# Altium PCB BMS_Current_Sense.PcbDoc
Units mm, origin at the board's own origin, x right, y up, seen from the top; angles counter-clockwise.
Board outline 39.5 x 34.35 mm, 2 copper layers (Top Layer, Bottom Layer), stack 1.595 mm thick; 57 components, 30 nets, 170 pads, 84 vias.
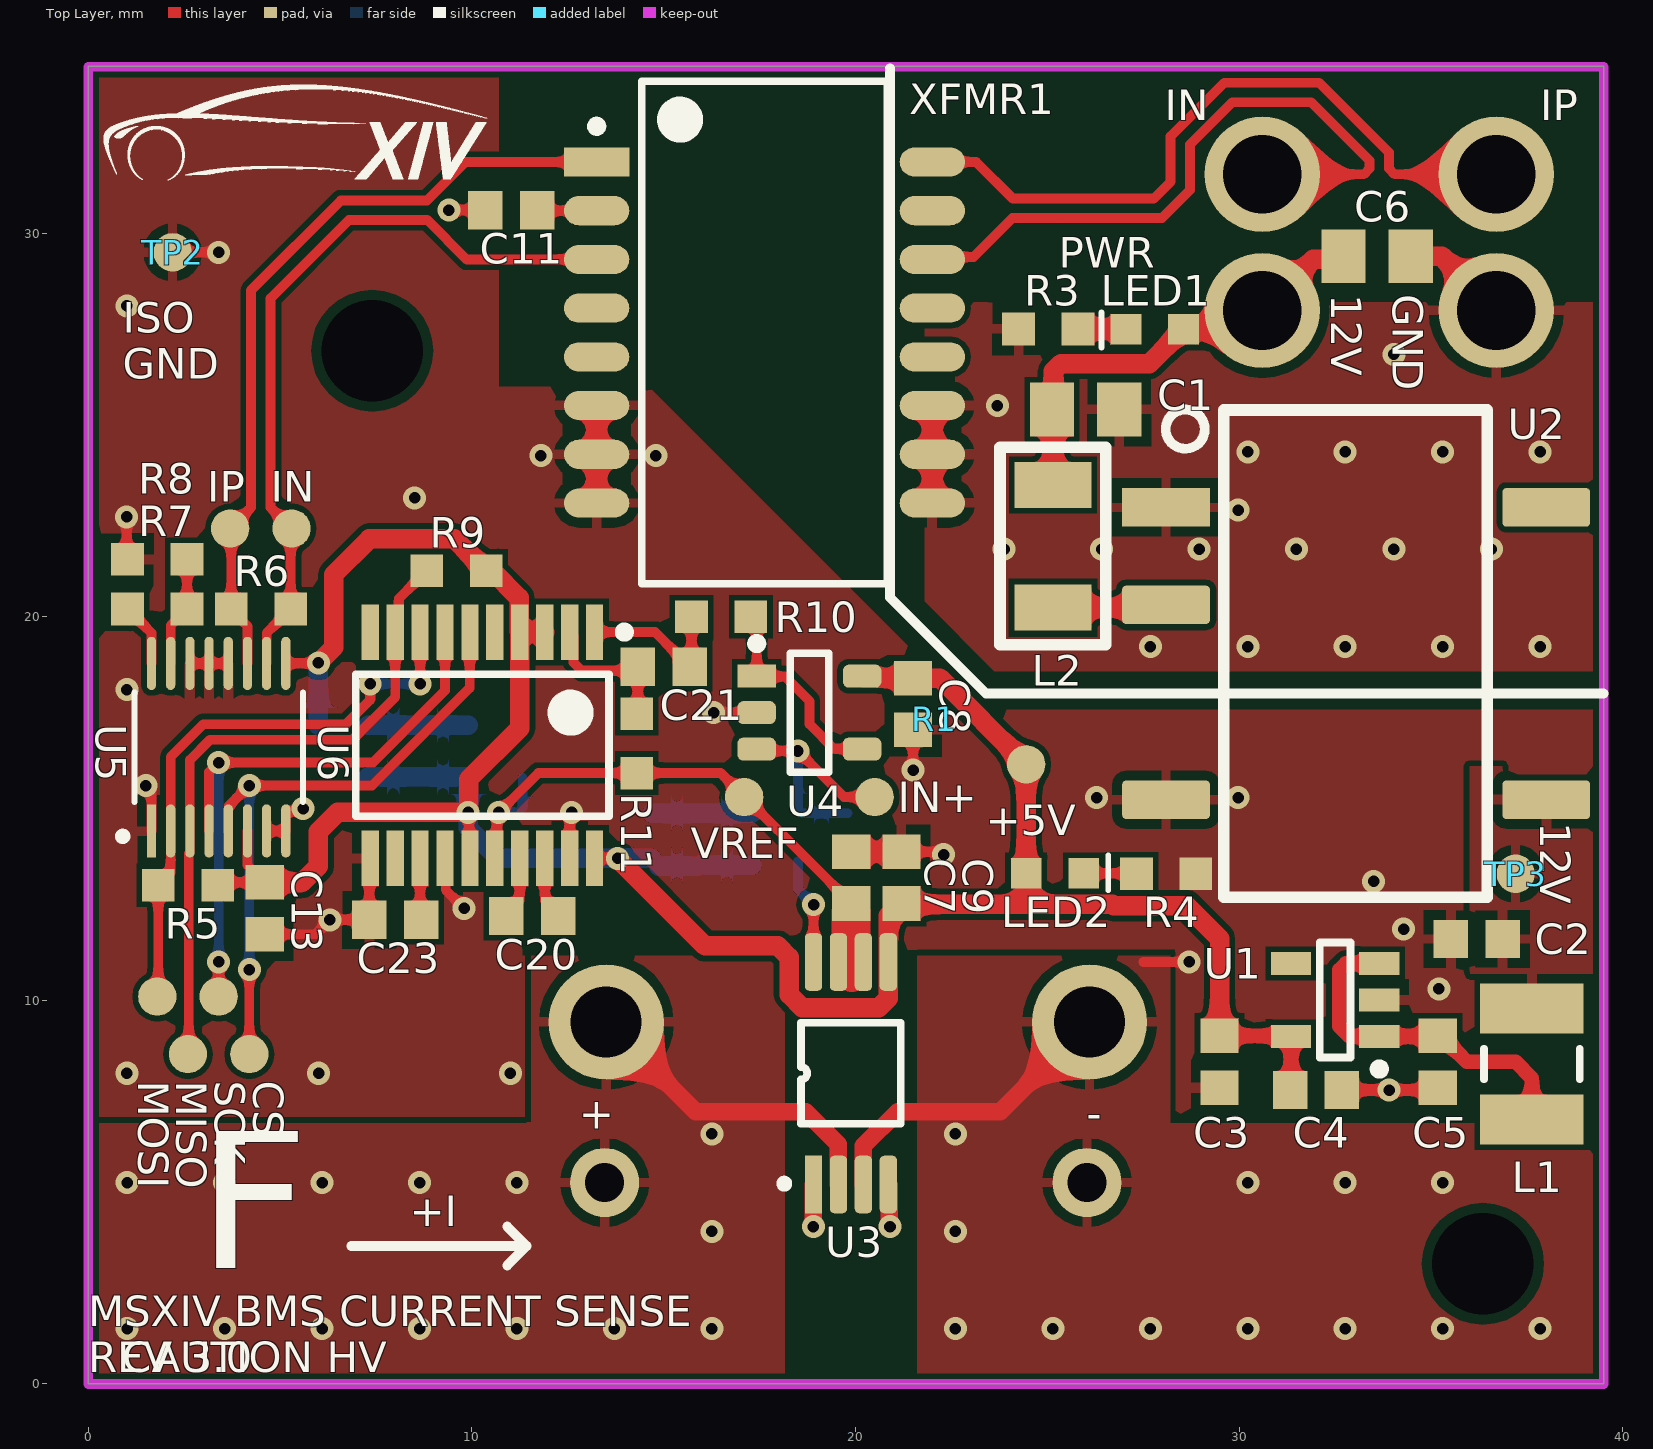
[diagram p0: Top Layer view]
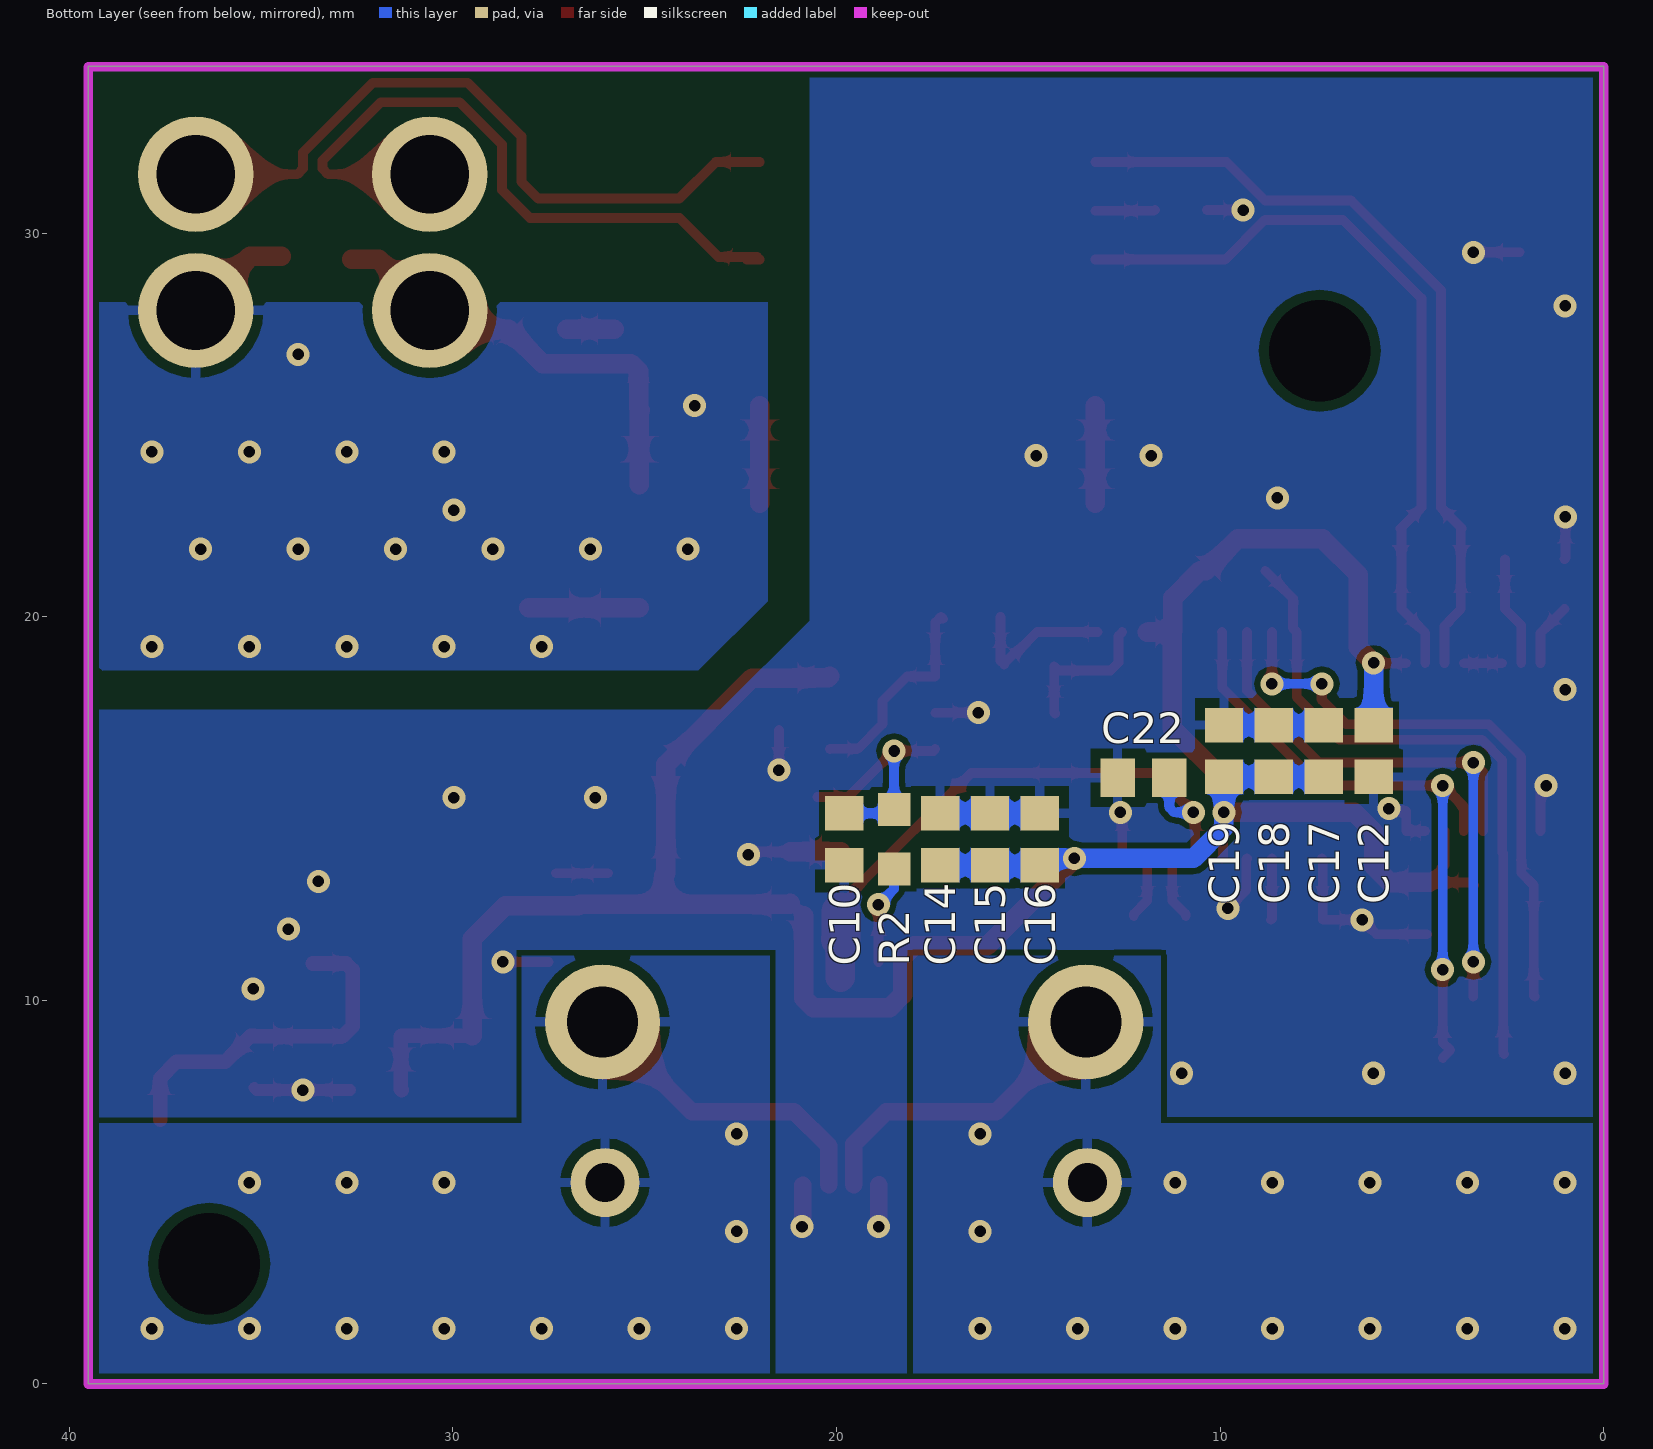
[diagram p1: Bottom Layer view, seen from below]
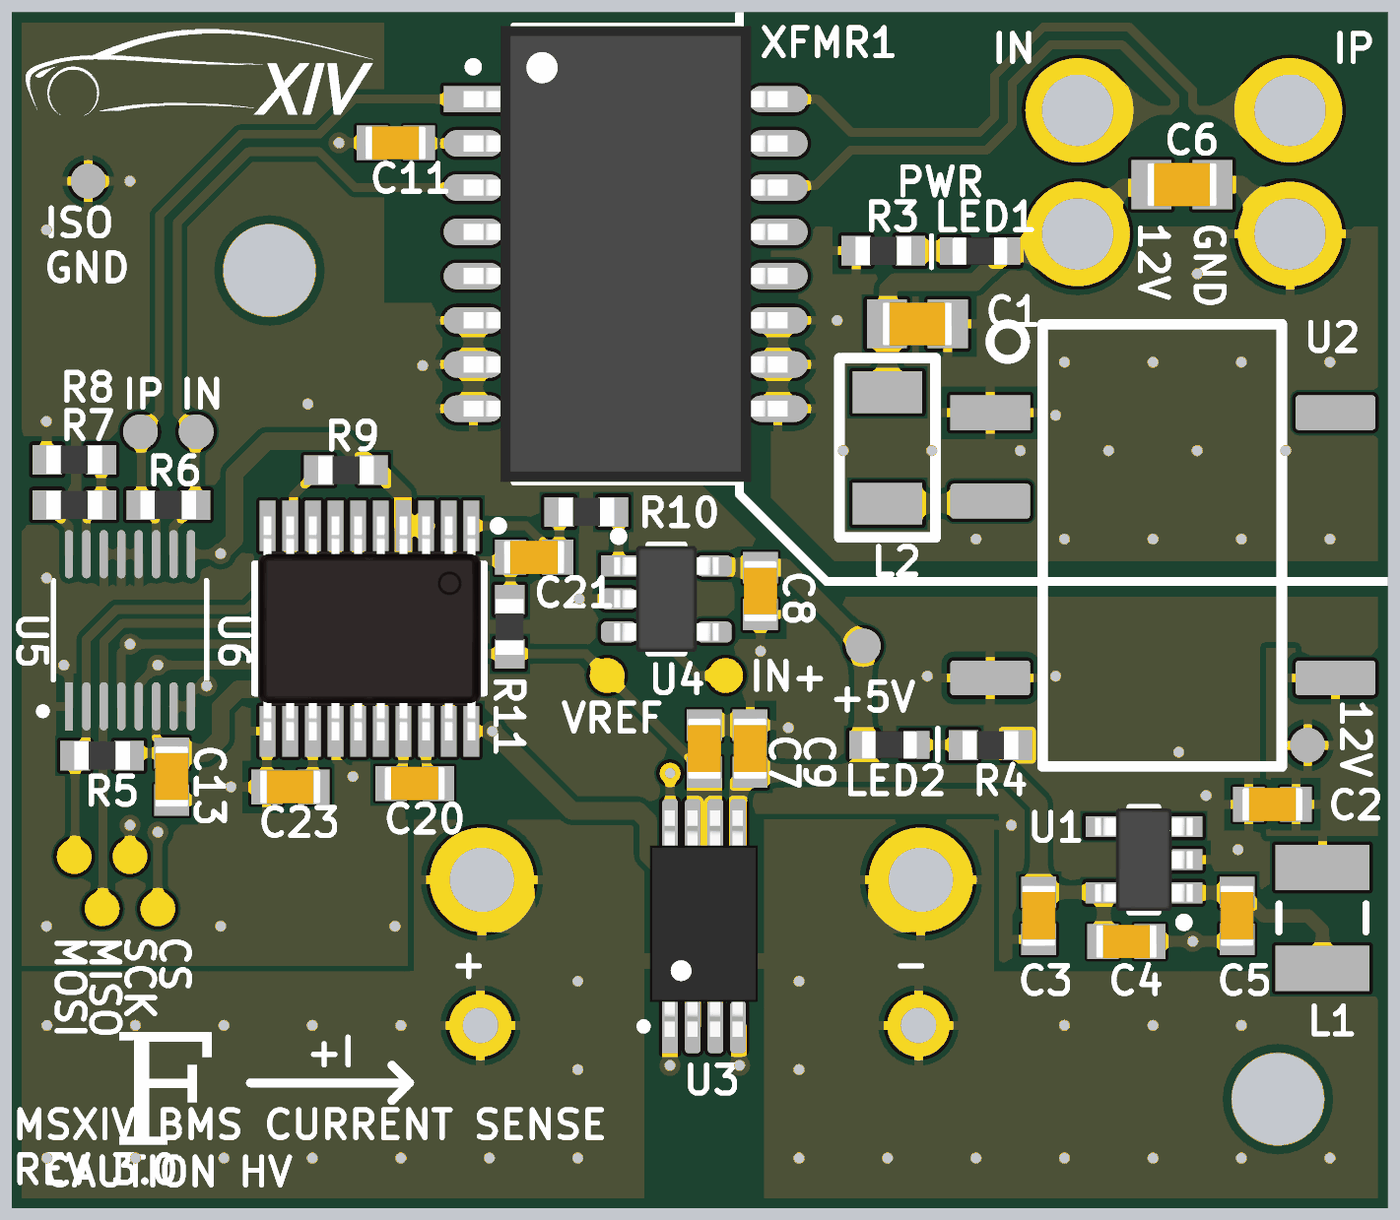
[diagram p2: 3D render of the assembled board from above, using the file's embedded part models]
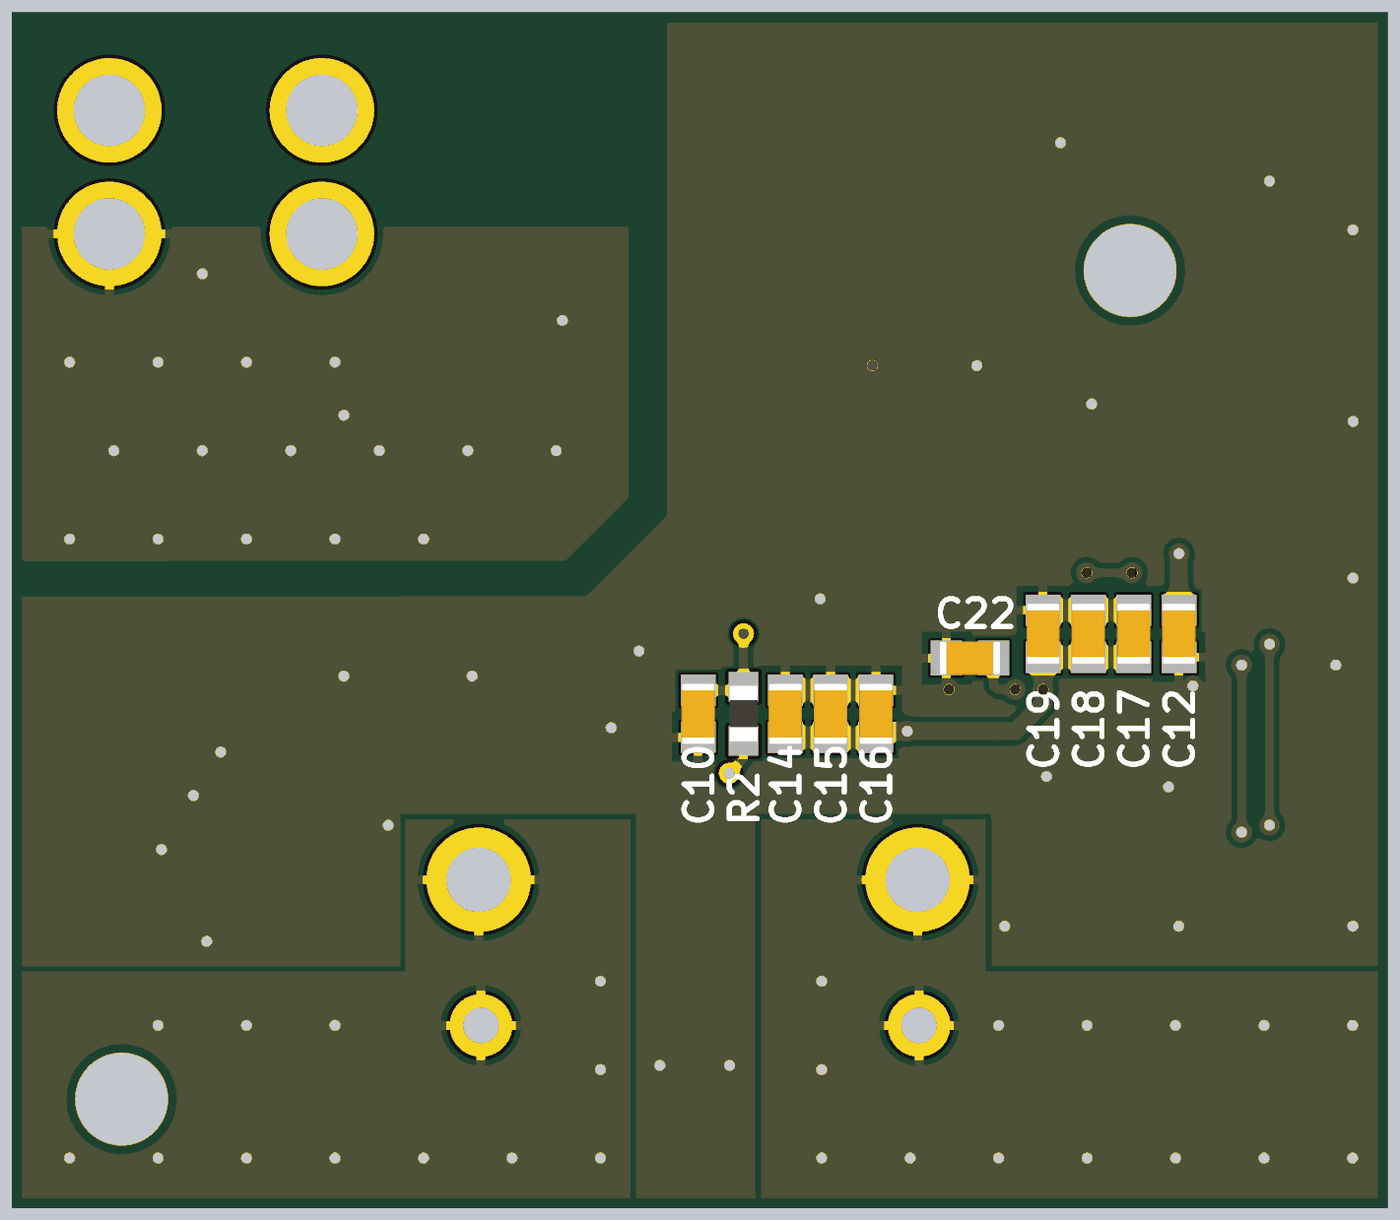
[diagram p3: 3D render of the assembled board from below, using the file's embedded part models]

## Layer stack, top to bottom
Top Solder: solder mask 0.0025, Solder Resist, Dk 0
Top Layer: signal copper 0.0356
Core: dielectric 1.524, FR-4, Dk 4.6
Bottom Layer: signal copper 0.0356
Bottom Solder: solder mask 0.0025, Solder Resist, Dk 0

## Board outline
0.006,0 39.506,0 39.506,34.35 0.006,34.35

## Design rules (kind name [scope] priority, off if disabled: settings)
Clearance "R1 Clearence" [InComponent('R1')] p1: gap=0.254 ignorepadtopadclearanceinfootprint=FALSE except(0: Arc-Hole Track-Hole SMDPad-SMDPad SMDPad-Hole THPad-THPad THPad-Hole Via-Hole Fill-Hole Poly-Hole Region-Hole Text-Hole)
Clearance [All] p2: gap=0.152 ignorepadtopadclearanceinfootprint=FALSE except(0: Arc-Hole Track-Hole SMDPad-Hole THPad-Hole Via-Hole Fill-Hole Poly-Hole Region-Hole Text-Hole)
ComponentClearance "R1 Clearance" [InComponent('R1')] p1: gap=0 collisioncheckmode=3 verticalgap=0 showdistances=FALSE
ComponentClearance [All] p2: gap=0.254 collisioncheckmode=3 verticalgap=0.254 showdistances=FALSE
DiffPairsRouting [All] p1: maxlimit=0.254 minlimit=0.254 mostfreqgap=0.254 toplayer_minwidth=0.254 toplayer_maxwidth=0.381 toplayer_prefwidth=0.254 bottomlayer_minwidth=0.254 bottomlayer_maxwidth=0.381 bottomlayer_prefwidth=0.254 maxuncoupledlength=12.7
PolygonConnect "Via Connect" [IsVia] p1: connectstyle=Direct reliefconductorwidth=0.254 reliefentries=4 polygonreliefangle="90 Angle" airgapwidth=0.254
PolygonConnect "Shunt Terminals" [InComponent('R4')and (InNet('SENSE_2_P') or InNet('SENSE_N'))] p2: connectstyle=Direct reliefconductorwidth=0.254 reliefentries=4 polygonreliefangle="90 Angle" airgapwidth=0.254
PolygonConnect [Not(IsVia)] p3: connectstyle=Relief reliefconductorwidth=0.254 reliefentries=4 polygonreliefangle="90 Angle" airgapwidth=0.254
RoutingVias [All] p1: holewidth=0 width=0.6 viastyle="Through Hole" minholewidth=0.3 minwidth=0.6 maxholewidth=0.711 maxwidth=1.27
SolderMaskExpansion [All] p1: expansion=0.102
Width [All] p1: maxlimit=1.27 minlimit=0.152 preferedwidth=0.254
28 further rules are at their usual default settings.

## Classes and differential pairs
component class ADC_Circuit: C14 C15 C16 C17 C18 C19 C20 C21 C22 C23 C? R9 R10 R11 U6 U?
component class isoSPI_Interface: C11 C12 C13 C? CS I_P IN IP MISO MOSI R5 R6 R7 R8 SCK TP? U5 U? XFMR1
component class BMS_Current_Sense: +5V "ADC IN" Ain C1 C2 C3 C4 C5 C6 C7 C8 C9 C10 C? IN+ "ISO GND" L1 L2 L? "LDO +5V" LED1 LED2 LED? R1 R2 R3 R4 TP2 TP3 TP? U1 U2 U3 U4 U? VREF
differential pair I_3: +I_3_P -I_3_N
differential pair ISOSPI_3: +ISOSPI_3_P -ISOSPI_3_N

## Components (designator, comment, footprint, x,y, rotation, side; value= is the part's Value field where it differs from the comment)
+5V "Test Point" "TEST POINT" 24.45,16.15 r90 top (schematic designator TP4)
C1 "CAP CER 4.7UF 50V 10% X5R 0805" "CAP, 0805" 26,25.4 r0 top value=4.7uF
C2 "CAP CER 2.2UF 25V 10% X5R 0603" "CAP, 0603" 36.195,11.6 r180 top
C3 "CAP CER 2.2UF 25V 10% X5R 0603" "CAP, 0603" 29.489,8.4 r270 top
C4 "CAP CER 1UF 50V 10% X7R 0603" "CAP, 0603" 32.004,7.663 r0 top
C5 "CAP CER 1UF 50V 10% X7R 0603" "CAP, 0603" 35.179,8.4 r270 top
C6 "CAP CER 10uF 25V 10% X5R 0805" "CAP, 0805" 33.6,29.4 r0 top
C7 "CAP CER 0.022UF 50V 10% X7R 0603" "CAP, 0603" 19.888,13.2 r90 top
C8 "CAP CER 0.1UF 50V 10% X7R 0603" "CAP, 0603" 21.5,17.725 r270 top
C9 "CAP CER 0.1UF 50V 10% X7R 0603" "CAP, 0603" 21.2,13.2 r90 top
C10 "CAP CER 10nF 50V 5% X7R 0603" "CAP, 0603" 19.8,14.2 r270 bottom
C11 "CAP CER 20PF 50V ±5% C0G/NP0 0603" "CAP, 0603" 11.025,30.6 r180 top
C12 "CAP CER 0.1UF 50V 10% X7R 0603" "CAP, 0603" 6,16.5 r270 bottom
C13 "CAP CER 0.1UF 50V 10% X7R 0603" "CAP, 0603" 4.6,12.4 r270 top
C14 "CAP CER 1UF 50V 10% X7R 0603" "CAP, 0603" 17.3,14.2 r90 bottom
C15 "CAP CER 0.1UF 50V 10% X7R 0603" "CAP, 0603" 16,14.2 r90 bottom
C16 "CAP CER 0.022UF 50V 10% X7R 0603" "CAP, 0603" 14.7,14.2 r90 bottom
C17 "CAP CER 1UF 50V 10% X7R 0603" "CAP, 0603" 7.3,16.5 r90 bottom
C18 "CAP CER 0.1UF 50V 10% X7R 0603" "CAP, 0603" 8.6,16.5 r90 bottom
C19 "CAP CER 0.022UF 50V 10% X7R 0603" "CAP, 0603" 9.9,16.5 r90 bottom
C20 "CAP CER 1UF 50V 10% X7R 0603" "CAP, 0603" 11.575,12.2 r0 top
C21 "CAP CER 10nF 50V 5% X7R 0603" "CAP, 0603" 15,18.7 r180 top
C22 "CAP CER 1UF 50V 10% X7R 0603" "CAP, 0603" 12,15.8 r0 bottom
C23 "CAP CER 1UF 50V 10% X7R 0603" "CAP, 0603" 8,12.1 r180 top
CS "Test Point" "Test Point"#1 4.2,8.5 r90 top (schematic designator TP10)
IN "Test Point" "TEST POINT" 5.3,22.3 r90 top (schematic designator TP6)
IN+ "Test Point" "Test Point"#2 20.5,15.3 r90 top (schematic designator TP1)
IP "Test Point" "TEST POINT" 3.7,22.3 r90 top (schematic designator TP5)
L1 "IND 100uH 60mA 5% 1210" 1210 37.643,8.349 r270 top value=100uH
L2 "IND 6.8uH 260mA 20% 1210" "NLFV32T-6R8M-EF/IND 6.8uH" 25.146,23.436 r270 top
LED1 "LED YELLOW CLEAR 2.1V 0603" LED_0603 28.5,27.5 r180 top
LED2 "LED GREEN CLEAR 2V 0603" LED_0603 24.5,13.3 r0 top
MISO "Test Point" "Test Point"#2 2.6,8.6 r0 top (schematic designator TP8)
MOSI "Test Point" "Test Point"#2 1.8,10.1 r0 top (schematic designator TP7)
R1 "100uOhm Shunt Resistor" "RES SHUNT 100UOHM 60MM" 26.103,9.433 r180 top locked
R2 "RES 120 OHM 1% 1/10W 0603" "RES, 0603" 18.5,14.2 r90 bottom
R3 "RES 4.7K OHM 1% 1/10W 0603" "RES, 0603" 25.025,27.5 r180 top
R4 "2K" "RES, 0603" 28.1,13.3 r0 top
R5 "2K" "RES, 0603" 2.6,13 r180 top
R6 "RES 120 OHM 1% 1/10W 0603" "RES, 0603" 4.5,20.2 r0 top
R7 "RES 1.4k OHM 1% 1/10W 0603" "RES, 0603" 1.8,20.2 r0 top
R8 "RES 604 OHM 1% 1/10W 0603" "RES, 0603" 1.8,21.5 r180 top
R9 "2K" "RES, 0603" 9.6,21.2 r180 top
R10 "RES 22.1 OHM 1% 1/10W 0603" "RES, 0603" 16.5,20 r180 top
R11 "RES 22.1 OHM 1% 1/10W 0603" "RES, 0603" 14.3,16.7 r90 top
SCK "Test Point" "Test Point"#2 3.4,10.1 r0 top (schematic designator TP9)
TP2 "Test Point" "TEST POINT" 2.2,29.5 r90 top
TP3 "Test Point" "TEST POINT" 37.206,13.3 r90 top
U1 "IC REG LDO 5V 0.1A SOT23-5" SOT95P280X145-5N 32.505,10.01 r180 top
U2 "IC DCDC ISOLATED 12V 1W 8-SMD 5-LEAD" "IC, Isolated DCDC" 29.246,22.85 r270 top locked
U3 "100V/V" "IC CURRENT AMPLIFIER INA240 TSSOP-8" 18.906,5.2 r90 top
U4 "IC OP AMP GEN PURPOSE RR 5.5MHZ SOT-23-5" "IC OP AMP GP RR 10MHZ SOT-23-5" 18.8,17.5 r0 top
U5 "IC ISOSPI COMM INTERFACE LTC6820IMS#3ZZPBF" "IC isoSPI Interface LTC6820 MSOP" 3.4,16.6 r90 top locked
U6 "IC ADC 24BIT SPI 14KSPS 20TSSOP" TSSOP65P640X120-20N 10.275,16.65 r270 top
VREF "Test Point" "Test Point"#2 17.1,15.3 r90 top (schematic designator TP11)
XFMR1 "IC PULSE XFMR 1CT:1CT 350UH SMD" "IC, PULSE XFMR 1CT:1CT 350UH SMD" 17.629,27.409 r0 top
? "Comment" "MSXIV Logo" 0.4,31.375 r0 top

## Footprints (in the part's own frame and the unit in brackets; to place one, negate y for a bottom-side part, rotate by r counter-clockwise, add the part's x,y. Pads: shape width x height; smd on the part's side, far side on the other; paste and mask are expansions set on the pad)
1210 [mm]
  rect 1.3x2.7 smd: 1(-1.441,-0.01) 2(1.459,-0.01)
  silkscreen extent -0.39,-1.26 0.41,1.24, body extent -1.69,-1.36 1.71,1.34, height 1.5
"CAP, 0603" [mm] "Chip Capacitor, 2-Leads, Body 1.60x0.81mm, IPC Medium Density"
  rect 0.9x1 smd mask+0.076: 1(-0.675,0) 2(0.675,0)
  body extent -0.87,-0.48 0.87,0.48, height 0.9
"CAP, 0805" [mm] "Chip Capacitor, 2-Leads, Body 2.00x1.25mm, IPC Medium Density"
  rect 1.15x1.4 smd: 1(-0.875,0) 2(0.875,0)
  body extent -1,-0.63 1,0.63, height 1.25
"IC CURRENT AMPLIFIER INA240 TSSOP-8" [mm]
  rect 1.5x0.45 smd: 1(0,0)
  rrect50% 1.5x0.45 smd: 2(0,-0.65) 3(0,-1.3) 4(0,-1.95) 5(5.8,-1.95) 6(5.8,-1.3) 7(5.8,-0.65) 8(5.8,0)
  silkscreen extent -0.06,-2.28 4.22,0.84, body extent -0.28,-2.52 6.22,0.58, height 1.2
"IC isoSPI Interface LTC6820 MSOP" [mil]
  rect 54.56x9.43 smd paste+0 mask+0: 1(-86,68.95)
  oval 54.56x9.43 smd paste+0 mask+0: 2(-86,49.25) 3(-86,29.55) 4(-86,9.85) 5(-86,-9.85) 6(-86,-29.55) 7(-86,-49.25) 8(-86,-68.95) 9(86,-68.95) 10(86,-49.25) 11(86,-29.55) 12(86,-9.85) 13(86,9.85) 14(86,29.55) 15(86,49.25) 16(86,68.95)
  silkscreen extent -95,-86 56,102
"IC OP AMP GP RR 10MHZ SOT-23-5" [mm] "SOT23, 5-Leads, Body 2.90x2.80mm, Pitch 0.95mm, IPC Medium Density"
  rect 1x0.6 smd: 1(-1.375,0.95)
  rrect50% 1x0.6 smd: 2(-1.375,0) 3(-1.375,-0.95) 4(1.375,-0.95) 5(1.375,0.95)
  silkscreen extent -1.5,-1.55 0.5,1.92, body extent -1.5,-1.53 1.5,1.53, height 1.45
"IC, Isolated DCDC" [mm]
  rect 1x2.29 smd: 1(0,-1.15)
  rrect20% 1x2.29 smd: 2(2.54,-1.15) 4(7.62,-1.15) 5(7.62,8.76) 8(0,8.76)
  silkscreen extent -2.55,-1.16 10.16,7.22, body extent -2.54,0.35 10.16,7.22, height 7
"IC, PULSE XFMR 1CT:1CT 350UH SMD" [mm] "PULSE XFMR 1CT:1CT 350UH SMD"
  rect 1.7x0.76 smd: 1(-4.375,4.445)
  oval 1.7x0.76 smd: 2(-4.375,3.175) 3(-4.375,1.905) 4(-4.375,0.635) 5(-4.375,-0.635) 6(-4.375,-1.905) 7(-4.375,-3.175) 8(-4.375,-4.445) 9(4.375,-4.445) 10(4.375,-3.175) 11(4.375,-1.905) 12(4.375,-0.635) 13(4.375,0.635) 14(4.375,1.905) 15(4.375,3.175) 16(4.375,4.445)
  silkscreen extent -4.5,-6.55 3.2,6.55, body extent -4.65,-6.55 4.65,6.55, height 5.9
LED_0603 [mm]
  rect 0.8x0.8 smd: 1(-0.05,0.01) 2(1.45,0.01)
  silkscreen extent 2.09,-0.43 2.09,0.48, body extent -0.1,-0.39 1.5,0.41, height 0.55
"MSXIV Logo" [mm]
  silkscreen extent 0,0 10,2.49
"NLFV32T-6R8M-EF/IND 6.8uH" [mm]
  rect 1.2x2 smd: 1(0,0) 2(3.2,0)
  silkscreen extent -0.98,-1.38 4.17,1.38, body extent -0.98,-1.38 4.17,1.38, height 2.2
"RES SHUNT 100UOHM 60MM" [mm]
  round 0 hole 2.65: 0(-10.25,6.3) 0(18.7,-17.5)
  round 3 hole 2.05: 1(-4.5,-18.55) 2(-10.6,-18.55) 3(-4.5,-22.1) 4(-10.6,-22.1)
  round 3 hole 1.85: 5(12.6,0) 6(0,0)
  body extent -36,-29.03 48.99,11.46, height 6.38
"RES, 0603" [mm] "Chip Resistor, 2-Leads, Body 1.60x0.80mm, IPC Medium Density"
  rect 0.85x0.85 smd: 1(-0.775,0) 2(0.775,0)
  body extent -0.8,-0.4 0.8,0.4, height 0.55
SOT95P280X145-5N [mm] "SOT23, 5-Leads, Body 2.95x2.80mm, Pitch 0.95mm, IPC Medium Density"
  rect 1.05x0.6 smd: 1(-1.15,0.95) 2(-1.15,0) 3(-1.15,-0.95) 4(1.15,-0.95) 5(1.15,0.95)
  silkscreen extent -1.28,-1.5 0.4,1.92, body extent -1.4,-1.48 1.4,1.48, height 1.45
"TEST POINT" [mm]
  round 1 smd: TP(0,0)
"Test Point"#1 [mm]
  round 1 smd paste-2: TP(0.1,0)
"Test Point"#2 [mm]
  round 1 smd paste-2: TP(0,0)
TSSOP65P640X120-20N [mm] "TSSOP, 20-Leads, Body 6.50x4.40mm, Pitch 0.65mm, IPC Medium Density"
  rect 1.45x0.45 smd: 1(-2.95,2.925) 2(-2.95,2.275) 3(-2.95,1.625) 4(-2.95,0.975) 5(-2.95,0.325) 6(-2.95,-0.325) 7(-2.95,-0.975) 8(-2.95,-1.625) 9(-2.95,-2.275) 10(-2.95,-2.925) 11(2.95,-2.925) 12(2.95,-2.275) 13(2.95,-1.625) 14(2.95,-0.975) 15(2.95,-0.325) 16(2.95,0.325) 17(2.95,0.975) 18(2.95,1.625) 19(2.95,2.275) 20(2.95,2.925)
  silkscreen extent -3.07,-3.3 1.85,3.83, body extent -3.21,-3.2 3.22,3.2, height 1.11

## Part data
C1: "4.7µF ±20% 50V Ceramic Capacitor X5R 0805 (2012 Metric)", Manufacturer 1="Murata Electronics North America", Manufacturer Part Number 1=GRT21BR61H475ME13L, Operating Temperature="-55°C ~ 85°C", Package / Case="0805 (2012 Metric)", Ratings=AEC-Q200, Supplier Part Number 1=490-12395-1-ND, Temperature Coefficient=X5R, Tolerance=±20%, Voltage - Rated=50V, Applications=Automotive, Category=Capacitors, ComponentLink1Description=http://search.murata.co.jp/Ceramy/image/img/A01X/G101/ENG/GRT21BR61H475ME13-01.pdf, ComponentLink1URL=http://search.murata.co.jp/Ceramy/image/img/A01X/G101/ENG/GRT21BR61H475ME13-01.pdf, Description 1="CAP CER 4.7UF 50V X5R 0805", Features=-, Height - Seated (Max)=-, Lead Spacing=-, Lead Style=-, Mounting Type="Surface Mount, MLCC", Packaging="Cut Tape (CT)", Part Status=Active, Pricing 1="1=0.56, 10=0.389, 100=0.2338, 500=0.17536, 1000=0.14808 (CAD)", RoHS="RoHS Compliant", Size / Dimension="0.079\" L x 0.049\" W (2.00mm x 1.25mm)", Stock 1=4286, Supplier 1=Digi-Key, Thickness (Max)="0.057\" (1.45mm)"
C2 C3: "2.2µF ±10% 25V Ceramic Capacitor X5R 0603 (1608 Metric)", Capacitance=2.2µF, Manufacturer 1="Murata Electronics North America", Manufacturer Part Number 1=GRM188R61E225KA12D, Operating Temperature="-55°C ~ 85°C", Package / Case="0603 (1608 Metric)", Ratings=-, Supplier Part Number 1=490-10731-1-ND, Temperature Coefficient=X5R, Tolerance=±10%, Voltage=25V, ComponentLink1Description=http://www.murata.com/~/media/webrenewal/support/library/catalog/products/capacitor/mlcc/c02e.ashx, ComponentLink1URL=http://www.murata.com/~/media/webrenewal/support/library/catalog/products/capacitor/mlcc/c02e.ashx, Height - Seated (Max)=-, Lead Spacing=-, Lead Style=-, Mounting Type="Surface Mount, MLCC", Packaging="Cut Tape (CT)", Part Status=Active, Size / Dimension="0.063\" L x 0.031\" W (1.60mm x 0.80mm)", Supplier 1=Digi-Key, Thickness (Max)="0.035\" (0.90mm)"
C4 C5 C14 C17 C20 C22 C23: "1µF ±10% 50V Ceramic Capacitor X7R 0603 (1608 Metric)", Capacitance=1µF, Manufacturer 1="Taiyo Yuden", Manufacturer Part Number 1=UMK107AB7105KA-T, Operating Temperature="-55°C ~ 125°C", Package / Case="0603 (1608 Metric)", Ratings=-, Supplier Part Number 1=587-3247-1-ND, Temperature Coefficient=X7R, Tolerance=±10%, Voltage=50V, ComponentLink1Description=http://www.yuden.co.jp/productdata/catalog/en/mlcc_all_e.pdf, ComponentLink1URL=http://www.yuden.co.jp/productdata/catalog/en/mlcc_all_e.pdf, Height - Seated (Max)=-, Lead Spacing=-, Lead Style=-, Mounting Type="Surface Mount, MLCC", Packaging="Cut Tape (CT)", Part Status=Active, Size / Dimension="0.063\" L x 0.031\" W (1.60mm x 0.80mm)", Supplier 1=Digi-Key, Thickness (Max)="0.037\" (0.95mm)"
C6: "10µF ±10% 25V Ceramic Capacitor X5R 0805 (2012 Metric)", Capacitance=10µF, Manufacturer="Murata Electronics North America", Manufacturer Part Number=GRM21BR61E106KA73L, Operating Temperature="-55°C ~ 85°C", Package / Case="0805 (2012 Metric)", Ratings=-, Supplier Part Number 1=490-5523-1-ND, Temperature Coefficient=X5R, Tolerance=±10%, Voltage - Rated=25V, Applications="General Purpose", Category=Capacitors, ComponentLink1Description=http://search.murata.co.jp/Ceramy/image/img/A01X/G101/ENG/GRM21BR61E106KA73-01.pdf, ComponentLink1URL=http://search.murata.co.jp/Ceramy/image/img/A01X/G101/ENG/GRM21BR61E106KA73-01.pdf, Features=-, Height - Seated (Max)=-, Lead Spacing=-, Lead Style=-, Mounting Type="Surface Mount, MLCC", Packaging="Cut Tape (CT)", Part Status=Active, Pricing 1="1=0.3, 10=0.214, 100=0.1008, 500=0.07068, 1000=0.05851 (CAD)", RoHS="RoHS Compliant", Size / Dimension="0.079\" L x 0.049\" W (2.00mm x 1.25mm)", Stock 1=1695157, Supplier 1=Digi-Key, Thickness (Max)="0.053\" (1.35mm)"
C7 C16 C19: "0.022µF ±10% 50V Ceramic Capacitor X7R 0603 (1608 Metric)", Manufacturer 1="Murata Electronics North America", Manufacturer Part Number 1=GRM188R71H223KA01D, Operating Temperature="-55°C ~ 125°C", Package / Case="0603 (1608 Metric)", Ratings=-, Supplier Part Number 1=490-1517-1-ND, Temperature Coefficient=X7R, Tolerance=±10%, Voltage - Rated=50V, Applications="General Purpose", Category=Capacitors, ComponentLink1Description=http://search.murata.co.jp/Ceramy/image/img/A01X/G101/ENG/GRM188R71H223KA01-01.pdf, ComponentLink1URL=http://search.murata.co.jp/Ceramy/image/img/A01X/G101/ENG/GRM188R71H223KA01-01.pdf, Description 1="CAP CER 0.022UF 50V X7R 0603", Features=-, Height - Seated (Max)=-, Lead Spacing=-, Lead Style=-, Mounting Type="Surface Mount, MLCC", Packaging="Cut Tape (CT)", Part Status=Active, Pricing 1="1=0.15, 10=0.111, 100=0.0499, 500=0.03564, 1000=0.02801 (CAD)", RoHS="RoHS Compliant", Size / Dimension="0.063\" L x 0.032\" W (1.60mm x 0.80mm)", Stock 1=612330, Supplier 1=Digi-Key, Thickness (Max)="0.035\" (0.90mm)"
C8 C9 C12 C13 C15 C18: "0.10µF ±10% 50V Ceramic Capacitor X7R 0603 (1608 Metric)", Capacitance=0.1µF, Manufacturer 1="AVX Corporation", Manufacturer Part Number 1=06035C104KAT2A, Operating Temperature="-55°C ~ 125°C", Package / Case="0603 (1608 Metric)", Ratings=-, Supplier Part Number 1=478-5052-1-ND, Temperature Coefficient=X7R, Tolerance=±10%, Voltage=50V, ComponentLink1Description=http://datasheets.avx.com/X7RDielectric.pdf, ComponentLink1URL=http://datasheets.avx.com/X7RDielectric.pdf, Height - Seated (Max)=-, Lead Spacing=-, Lead Style=-, Mounting Type="Surface Mount, MLCC", Packaging="Cut Tape (CT)", Part Status=Active, Size / Dimension="0.063\" L x 0.032\" W (1.60mm x 0.81mm)", Supplier 1=Digi-Key, Thickness (Max)="0.035\" (0.90mm)"
C10 C21: "10000pF ±5% 50V Ceramic Capacitor U2J 0603 (1608 Metric)", Capacitance=10000pF, Manufacturer 1=KEMET, Manufacturer Part Number 1=C0603C103J5JAC7867, Operating Temperature="-55°C ~ 125°C", Package / Case="0603 (1608 Metric)", Ratings=-, Supplier Part Number 1=399-13384-1-ND, Temperature Coefficient=U2J, Tolerance=±5%, Voltage=50V, ComponentLink1Description=http://www.kemet.com/docfinder?Partnumber=C0603C103J5JAC7867, ComponentLink1URL=http://www.kemet.com/docfinder?Partnumber=C0603C103J5JAC7867, Failure Rate=-, Height - Seated (Max)=-, Lead Spacing=-, Lead Style=-, Mounting Type="Surface Mount, MLCC", Packaging="Cut Tape (CT)", Part Status=Active, Size / Dimension="0.063\" L x 0.032\" W (1.60mm x 0.80mm)", Supplier 1=Digi-Key, Thickness (Max)="0.034\" (0.87mm)"
C11: "20pF ±5% 50V Ceramic Capacitor C0G, NP0 0603 (1608 Metric)", Capacitance=20pF, Manufacturer 1="Murata Electronics North America", Manufacturer Part Number 1=GRM1885C1H200JA01D, Operating Temperature="-55°C ~ 125°C", Package / Case="0603 (1608 Metric)", Ratings=-, Supplier Part Number 1=490-1410-1-ND, Temperature Coefficient="C0G, NP0", Tolerance=±5%, Voltage=50V, ComponentLink1Description=http://www.murata.com/~/media/webrenewal/support/library/catalog/products/capacitor/mlcc/c02e.ashx, ComponentLink1URL=http://www.murata.com/~/media/webrenewal/support/library/catalog/products/capacitor/mlcc/c02e.ashx, Height - Seated (Max)=-, Lead Spacing=-, Lead Style=-, Mounting Type="Surface Mount, MLCC", Packaging="Cut Tape (CT)", Part Status=Active, Size / Dimension="0.063\" L x 0.031\" W (1.60mm x 0.80mm)", Supplier 1=Digi-Key, Thickness (Max)="0.035\" (0.90mm)"
L1: "100µH Unshielded Wirewound Inductor 60mA 11 Ohm Max 1210 (3225 Metric)", DC Resistance (DCR)="11 Ohm Max", Manufacturer="EPCOS (TDK)", Manufacturer Part Number=B82422T1104J000, Operating Temperature="-55°C ~ 125°C", Package / Case="1210 (3225 Metric)", Q @ Freq="20 @ 796kHz", Ratings=AEC-Q200, Supplier Part Number 1=495-5646-1-ND, Tolerance=±5%, Category="Inductors, Coils, Chokes", ComponentLink1Description=https://en.tdk.eu/inf/30/db/ind_2008/b82422t.pdf, ComponentLink1URL=https://en.tdk.eu/inf/30/db/ind_2008/b82422t.pdf, Height - Seated (Max)="0.083\" (2.10mm)", Material - Core=Ferrite, Mounting Type="Surface Mount", Packaging="Cut Tape (CT)", Part Status=Active, Pricing 1="1=0.65, 10=0.568, 100=0.4062, 500=0.3412, 1000=0.27621 (CAD)", RoHS="RoHS Compliant", Shielding=Unshielded, Size / Dimension="0.126\" L x 0.098\" W (3.20mm x 2.50mm)", Stock 1=4846, Supplier 1=Digi-Key, Supplier Device Package="1210 (3225 Metric)", Type=Wirewound
L2: "6.8µH Shielded Wirewound Inductor 260mA 204 mOhm Max 1210 (3225 Metric)", Current - Saturation=-, Current Rating=260mA, DC Resistance (DCR)="204 mOhm Max", Inductance=6.8µH, Manufacturer 1="TDK Corporation", Manufacturer Part Number 1=NLFV32T-6R8M-EF, Operating Temperature="-40°C ~ 105°C", Package / Case="1210 (3225 Metric)", Supplier Part Number 1=445-15776-1-ND, Tolerance=±20%, ComponentLink1Description=https://product.tdk.com/info/en/catalog/datasheets/inductor_commercial_decoupling_nlfv32-ef_en.pdf, ComponentLink1URL=https://product.tdk.com/info/en/catalog/datasheets/inductor_commercial_decoupling_nlfv32-ef_en.pdf, Frequency - Self Resonant=-, Height - Seated (Max)="0.094\" (2.40mm)", Material - Core=Ferrite, Mounting Type="Surface Mount", Packaging="Cut Tape (CT)", Part Status=Active, Q @ Freq=-, Ratings=-, Shielding=Shielded, Size / Dimension="0.126\" L x 0.098\" W (3.20mm x 2.50mm)", Supplier 1=Digi-Key, Supplier Device Package="1210 (3225 Metric)", Type=Wirewound
LED1: "Yellow 590nm LED Indication - Discrete 2V 0603 (1608 Metric)", Color=Yellow, Current - Test=20mA, Lens Color=Colorless, Manufacturer="Wurth Electronics Inc.", Manufacturer Part Number=150060YS75000, Millicandela Rating=120mcd, Package / Case="0603 (1608 Metric)", Supplier Device Package=0603, Supplier Part Number 1=732-4981-1-ND, Voltage - Forward (Vf) (Typ)=2V, Category=Optoelectronics, ComponentLink1Description=http://katalog.we-online.de/led/datasheet/150060YS75000.pdf, ComponentLink1URL=http://katalog.we-online.de/led/datasheet/150060YS75000.pdf, Features=-, Height (Max)=0.80mm, Lens Style/Size="Rectangle with Flat Top, 1.10mm x 0.70mm", Lens Transparency=Clear, Mounting Type="Surface Mount", Packaging="Cut Tape (CT)", Part Status=Active, Pricing 1="1=0.21, 100=0.1617, 500=0.13964 (CAD)", RoHS="RoHS Compliant", Size / Dimension="1.60mm L x 0.80mm W", Stock 1=10523, Supplier 1=Digi-Key, Viewing Angle=140°, Wavelength - Dominant=590nm, Wavelength - Peak=595nm
LED2: "Green 572nm LED Indication - Discrete 2V 0603 (1608 Metric)", Color=Green, Current - Test=20mA, Lens Color=Colorless, Manufacturer="Wurth Electronics Inc.", Manufacturer Part Number=150060VS75000, Millicandela Rating=40mcd, Package / Case="0603 (1608 Metric)", Supplier Device Package=0603, Supplier Part Number 1=732-4980-1-ND, Voltage - Forward (Vf) (Typ)=2V, Category=Optoelectronics, ComponentLink1Description=http://katalog.we-online.de/led/datasheet/150060VS75000.pdf, ComponentLink1URL=http://katalog.we-online.de/led/datasheet/150060VS75000.pdf, Features=-, Height (Max)=0.80mm, Lens Style/Size="Rectangle with Flat Top, 1.10mm x 0.70mm", Lens Transparency=Clear, Mounting Type="Surface Mount", Packaging="Cut Tape (CT)", Part Status=Active, Pricing 1="1=0.21, 100=0.1617, 500=0.13964 (CAD)", RoHS="RoHS Compliant", Size / Dimension="1.60mm L x 0.80mm W", Stock 1=9408, Supplier 1=Digi-Key, Viewing Angle=140°, Wavelength - Dominant=570nm, Wavelength - Peak=572nm
R1: library part "RES SHUNT 100UOHM 5% 36W 60MM", "100 µOhms ±5% 36W Shunt, Battery Specialized Resistor Metal Element ±175ppm/°C Shunt Fixture, 60mm Pitch", Manufacturer 1="Vishay Dale", Manufacturer Part Number 1=WSBM8518L1000JK, Operating Temperature="-65°C ~ 170°C", Power (Watts)=36W, Supplier Part Number 1=541-1906-ND, Temperature Coefficient=±175ppm/°C, Tolerance=±5%, Applications=-, Category=Resistors, ComponentLink1Description=http://www.vishay.com/docs/31094/wsbm8518.pdf, ComponentLink1URL=http://www.vishay.com/docs/31094/wsbm8518.pdf, Composition="Metal Element", Description 1="RES SHUNT 100 UOHM 5% 36W", Mounting Type="Shunt Fixture, 60mm Pitch", Packaging=Bulk, Part Status=Active, Pricing 1="1=16.24, 10=14.764, 25=13.2876, 50=11.442, 100=10.5192, 250=9.9656, 500=9.5965, 1000=9.15359 (CAD)", RoHS="RoHS Compliant", Stock 1=0, Supplier 1=Digi-Key, Type="Shunt, Battery"
R2 R6: "RES SMD 120 OHM 1% 1/10W 0603", Manufacturer 1=Yageo, Manufacturer Part Number 1=RC0603FR-07120RL, Operating Temperature="-55°C ~ 155°C", Package / Case="0603 (1608 Metric)", Power=1/10W, Resistance=120, Supplier Device Package=0603, Supplier Part Number 1=311-120HRCT-ND, Temperature Coefficient=±100ppm/°C, Tolerance=±1%, ComponentLink1Description=http://www.yageo.com/documents/recent/PYu-RC_Group_51_RoHS_L_7.pdf, ComponentLink1URL=http://www.yageo.com/documents/recent/PYu-RC_Group_51_RoHS_L_7.pdf, Composition="Thick Film", Failure Rate=-, Height - Seated (Max)="0.022\" (0.55mm)", Packaging="Cut Tape (CT)", Part Status=Active, Size / Dimension="0.063\" L x 0.031\" W (1.60mm x 0.80mm)", Supplier 1=Digi-Key
R3: "4.7k Ohm ±1% 0.1W, 1/10W Chip Resistor 0603 (1608 Metric) Moisture Resistant Thick Film", Manufacturer 1=Yageo, Manufacturer Part Number 1=RC0603FR-074K7L, Operating Temperature="-55°C ~ 155°C", Package / Case="0603 (1608 Metric)", Power (Watts)=1/10W, Resistance (Ohms)=4.7k, Supplier Device Package=0603, Supplier Part Number 1=311-4.70KHRCT-ND, Temperature Coefficient=±100ppm/°C, Tolerance=±1%, Category=Resistors, ComponentLink1Description=http://www.yageo.com/documents/recent/PYu-RC_Group_51_RoHS_L_7.pdf, ComponentLink1URL=http://www.yageo.com/documents/recent/PYu-RC_Group_51_RoHS_L_7.pdf, Composition="Thick Film", Description 1="RES SMD 4.7K OHM 1% 1/10W 0603", Failure Rate=-, Features="Moisture Resistant", Height - Seated (Max)="0.022\" (0.55mm)", Packaging="Cut Tape (CT)", Part Status=Active, Pricing 1="1=0.16, 10=0.022, 100=0.0089, 1000=0.00402, 2500=0.00349 (CAD)", RoHS="RoHS Compliant", Size / Dimension="0.063\" L x 0.031\" W (1.60mm x 0.80mm)", Stock 1=3487566, Supplier 1=Digi-Key
R4 R5 R9: library part "RES 2K OHM 1% 1/10W 0603", "2k Ohm ±1% 0.1W, 1/10W Chip Resistor 0603 (1608 Metric) Moisture Resistant Thick Film", Manufacturer=Yageo, Manufacturer Part Number=RC0603FR-072KL, Operating Temperature="-55°C ~ 155°C", Package / Case="0603 (1608 Metric)", Power (Watts)="0.1W, 1/10W", Resistance (Ohms)=2k, Supplier Device Package=0603, Supplier Part Number 1=311-2.00KHRCT-ND, Temperature Coefficient=±100ppm/°C, Tolerance=±1%, Category=Resistors, ComponentLink1Description=http://www.yageo.com/documents/recent/PYu-RC_Group_51_RoHS_L_7.pdf, ComponentLink1URL=http://www.yageo.com/documents/recent/PYu-RC_Group_51_RoHS_L_7.pdf, Composition="Thick Film", Failure Rate=-, Features="Moisture Resistant", Height - Seated (Max)="0.022\" (0.55mm)", Packaging="Cut Tape (CT)", Part Status=Active, Pricing 1="1=0.15, 10=0.023, 100=0.0093, 1000=0.00415, 2500=0.0036 (CAD)", RoHS="RoHS Compliant", Size / Dimension="0.063\" L x 0.031\" W (1.60mm x 0.80mm)", Stock 1=1750701, Supplier 1=Digi-Key
R7: "RES SMD 1.4K OHM 1% 1/10W 0603", Manufacturer 1=Yageo, Manufacturer Part Number 1=RC0603FR-071K4L, Operating Temperature="-55°C ~ 155°C", Package / Case="0603 (1608 Metric)", Power=1/10W, Resistance=1.4k, Supplier Device Package=0603, Supplier Part Number 1=311-1.40KHRCT-ND, Temperature Coefficient=±100ppm/°C, Tolerance=±1%, ComponentLink1Description=http://www.yageo.com/documents/recent/PYu-RC_Group_51_RoHS_L_7.pdf, ComponentLink1URL=http://www.yageo.com/documents/recent/PYu-RC_Group_51_RoHS_L_7.pdf, Composition="Thick Film", Failure Rate=-, Height - Seated (Max)="0.022\" (0.55mm)", Packaging="Cut Tape (CT)", Part Status=Active, Size / Dimension="0.063\" L x 0.031\" W (1.60mm x 0.80mm)", Supplier 1=Digi-Key
R8: "RES SMD 604 OHM 1% 1/10W 0603", Manufacturer 1=Yageo, Manufacturer Part Number 1=RC0603FR-07604RL, Operating Temperature="-55°C ~ 155°C", Package / Case="0603 (1608 Metric)", Power=1/10W, Resistance=604, Supplier Device Package=0603, Supplier Part Number 1=311-604HRCT-ND, Temperature Coefficient=±100ppm/°C, Tolerance=±1%, ComponentLink1Description=http://www.yageo.com/documents/recent/PYu-RC_Group_51_RoHS_L_7.pdf, ComponentLink1URL=http://www.yageo.com/documents/recent/PYu-RC_Group_51_RoHS_L_7.pdf, Composition="Thick Film", Failure Rate=-, Height - Seated (Max)="0.022\" (0.55mm)", Packaging="Cut Tape (CT)", Part Status=Active, Size / Dimension="0.063\" L x 0.031\" W (1.60mm x 0.80mm)", Supplier 1=Digi-Key
R10 R11: "22.1 Ohm ±1% 0.1W, 1/10W Chip Resistor 0603 (1608 Metric) Moisture Resistant Thick Film", Manufacturer 1=Yageo, Manufacturer Part Number 1=RC0603FR-0722R1L, Operating Temperature="-55°C ~ 155°C", Package / Case="0603 (1608 Metric)", Power=1/10W, Resistance=22.1, Supplier Device Package=0603, Supplier Part Number 1=311-22.1HRCT-ND, Temperature Coefficient=±100ppm/°C, Tolerance=±1%, ComponentLink1Description=http://www.yageo.com/documents/recent/PYu-RC_Group_51_RoHS_L_7.pdf, ComponentLink1URL=http://www.yageo.com/documents/recent/PYu-RC_Group_51_RoHS_L_7.pdf, Composition="Thick Film", Failure Rate=-, Height - Seated (Max)="0.022\" (0.55mm)", Packaging="Cut Tape (CT)", Part Status=Active, Size / Dimension="0.063\" L x 0.031\" W (1.60mm x 0.80mm)", Supplier 1=Digi-Key
U1: "Linear Voltage Regulator IC Positive Fixed Output 5V 100mA SOT-23-5", Current - Limit (Min)=-, Current - Output=100mA, Manufacturer 1=STMicroelectronics, Manufacturer Part Number 1=LD2981CM50TR, Operating Temperature="-40°C ~ 125°C", Package / Case="SC-74A, SOT-753", Supplier Device Package=SOT-23-5, Supplier Part Number 1=497-7787-1-ND, Voltage - Dropout (Typical)="0.18V @ 100mA", Voltage - Input="Up to 16V", Voltage - Output=5V, ComponentLink1Description=http://www.st.com/content/ccc/resource/technical/document/datasheet/group1/b7/b5/a1/83/9c/bd/4a/90/CD00001635/files/CD00001635.pdf/jcr:content/translations/en.CD00001635.pdf, ComponentLink1URL=http://www.st.com/content/ccc/resource/technical/document/datasheet/group1/b7/b5/a1/83/9c/bd/4a/90/CD00001635/files/CD00001635.pdf/jcr:content/translations/en.CD00001635.pdf, Mounting Type="Surface Mount", Packaging="Cut Tape (CT)", Part Status=Active, Regulator Topology="Positive Fixed", Supplier 1=Digi-Key
U2: "Isolated Module DC DC Converter 1 Output 12V 84mA 10.8V - 13.2V Input", Current - Output (Max)=84mA, Manufacturer 1="XP Power", Manufacturer Part Number 1=ISE1212A, Operating Temperature="-40°C ~ 105°C", Package / Case="8-SMD Module, 5 Leads", Power=1W, Supplier Part Number 1=1470-2950-1-ND, Voltage - Input (Max)=13.2V, Voltage - Input (Min)=10.8V, Voltage - Isolation="1.5kV (1500V)", Voltage - Output 1=12V, Voltage - Output 2=-, ComponentLink1Description=http://www.xppower.com/Portals/0/pdfs/SF_ISE.pdf, ComponentLink1URL=http://www.xppower.com/Portals/0/pdfs/SF_ISE.pdf, Efficiency=81%, Mounting Type="Surface Mount", Number of Outputs=1, Packaging="Cut Tape (CT)", Part Status=Active, Size / Dimension="0.50\" L x 0.44\" W x 0.29\" H (12.7mm x 11.2mm x 7.3mm)", Supplier 1=Digi-Key, Type="12V-12V Isolated DCDC", Voltage - Output 3=-
U3: library part "IC CURRENT AMPLIFIER INA240 8-TSSOP", "Current Sense Amplifier 1 Circuit 8-TSSOP", Current - Supply=1.8mA, Manufacturer 1="Texas Instruments", Manufacturer Part Number 1=INA240A3PWR, Operating Temperature="-40°C ~ 125°C", Package / Case="8-TSSOP (0.173\", 4.40mm Width)", Supplier Device Package=8-TSSOP, Supplier Part Number 1=296-45090-1-ND, Voltage - Supply, Single/Dual (±)="2.7 V ~ 5.5 V", Amplifier Type="Current Sense", Category="Integrated Circuits (ICs)", ComponentLink1Description=http://www.ti.com/lit/ds/symlink/ina240.pdf, ComponentLink1URL=http://www.ti.com/lit/ds/symlink/ina240.pdf, Description 1="IC AMP CURRENT SENSE 8-TSSOP", Mounting Type="Surface Mount", Output Type=-, Packaging="Cut Tape (CT)", Part Status=Active, Pricing 1="1=3.79, 10=3.397, 100=2.7311, 500=2.24388, 1000=1.85921 (CAD)", RoHS="RoHS Compliant", Slew Rate="2 V/µs", Stock 1=1286, Supplier 1=Digi-Key
U4: "General Purpose Amplifier 1 Circuit Rail-to-Rail SOT-23-5", Case/Package=SOT-23-5, Input Bias Current=10pA, Input Offset Voltage (Vos)=25uV, Manufacturer="Texas Instruments", Manufacturer Part Number=OPA376AQDBVRQ1, Max Operating Temperature=125°C, Max Supply Voltage=5.5V, Min Operating Temperature=-40°C, Min Supply Voltage=2.2V, Nominal Supply Current=950uA, Operating Supply Current=760uA, Output Current=30mA, Output Current per Channel=50mA, Package Quantity=3000, Power Supply Rejection Ratio (PSRR)=106.02dB, Supplier Part Number 1=296-36701-1-ND, Voltage Gain=134dB, Common Mode Rejection Ratio=76dB, ComponentLink1Description=http://www.ti.com/lit/ds/sbos549/sbos549.pdf?src-supplier=Avnet, ComponentLink1URL=http://www.ti.com/lit/ds/sbos549/sbos549.pdf?src-supplier=Avnet, Gain Bandwidth Product=5.5MHz, Lead Free="Lead Free", Max I/O Voltage=25uV, Number of Channels=1, Number of Circuits=1, Number of Elements=1, Number of Pins=5, Packaging="Tape and Reel", Pricing 1="1 = 2.14000, 10 = 1.92200, 100 = 1.54450, 500 = 1.26896, 1000 = 1.05142 (USD)", Radiation Hardening=No, RoHS=Yes, Slew Rate=2V/µs, Stock 1=26635, Supplier 1=Digi-Key, Unity Gain Bandwidth Product=5.5MHz
U5: "IC COMM INTERFACE ISOSPI 16-MSOP", Manufacturer="Linear Technology", Manufacturer Part Number=LTC6820IMS#3ZZPBF, Package / Case="16-Lead Plastic MSOP", Supplier Part Number 1=LTC6820IMS#3ZZPBF-ND, Voltage - Supply="2.7 V ~ 5.5 V", Applications="Isolated Communications Interface", Category="Integrated Circuits (ICs)", ComponentLink1Description=http://www.linear.com/docs/42317, ComponentLink1URL=http://www.linear.com/docs/42317, Interface=SPI, Mounting Type="Surface Mount", Packaging=Tube, Part Status=Active, RoHS="RoHS Compliant", Supplier 1=Digi-Key, Supplier Device Package="16-Lead Plastic MSOP"
U6: "24 Bit Analog to Digital Converter 1 Input 1 Sigma-Delta 20-TSSOP", Supplier Part Number 1=296-38039-1-ND, Supplier 1=Digi-Key
XFMR1: "PULSE XFMR 1CT:1CT 350UH SMD", Inductance=350uH, Isolation Voltage=1.5kVrms, Manufacturer="Bourns Inc.", Supplier Part Number 1=PT61018AAPEL-SCT-ND, MFG_PN=PT61018AAPEL-S, Supplier=Digikey, Supplier 1=Digi-Key, Supplier_PN=PT61018AAPEL-SCT-ND

## Free pads (board coordinates)
  round 1.8 hole 1.02: 1(13.462,5.25) 2(26.035,5.25)

## Via types
v1: diameter 0.6, hole 0.3, Top Layer to Bottom Layer, tented both sides, 82 vias
v2: diameter 0.6, hole 0.3, Top Layer to Bottom Layer, 2 vias

## Nets (pads, with @x,y where several pads share a name; then routed paths per layer and width w, separated by ;. In a path a pad name is that pad's centre, name@x,y a point inside that pad or via, vN(x,y) a via of type N, cw(c..) or ccw(c..) an arc to the next point about the centre after c; other vN are vias at no path point)
+12V: C1.1 C6.1 L2.1 LED1.1 R1.1 | length 11.8
  Top Layer w0.254: R1.1@30.11,27.49 R1.1 ; C6.1@32.638,29.313 C6.1
  Top Layer w0.508: C1.1@25.111,25.386 C1.1 25.16,25.435 25.16,26.4 25.36,26.6 27.66,26.6 LED1.1 R1.1@30.11,27.49 ; L2.1 C1.1@25.146,25.4 ; R1.1 31.933,29.313 C6.1@32.638,29.313
CSN: CS.TP U5.5 U6.6 | length 16.9
  Top Layer w0.254: U5.5 3.65,15.053 4.197,15.6 v1(4.2,15.6) 7.4,15.6 9.943,18.143 9.943,19.593 U6.6 ; CS.TP@4.2,8.5 4,8.7 4.2,8.9 v1(4.2,10.8)
  Bottom Layer w0.254: v1(4.2,10.8) v1(4.2,15.6)
GND: C1.2 C6.2 R1.2 R3.2 U2.1 XFMR1.9 XFMR1.10 XFMR1.11 | length 5.4
  Top Layer w0.508: XFMR1.9 XFMR1.10 XFMR1.11 ; C6.2 35.286,29.4 R1.2
  other v1: 27.686,19.22 30.226,19.22 32.766,19.22 35.306,19.22 37.846,19.22 23.876,21.76 26.416,21.76 28.956,21.76 31.496,21.76 34.036,21.76 36.576,21.76 29.972,22.776 30.226,24.3 32.766,24.3 35.306,24.3 37.846,24.3 23.7,25.5 34.036,26.84
I_3_N: IN.TP R6.2 U5.10 XFMR1.3 | length 19.8
  Top Layer w0.254: U5.10 4.651,19.576 R6.2 5.275,22.275 IN.TP 4.754,22.846 4.754,23.546 4.754,28.3 6.795,30.341 8.839,30.341 9.867,29.314 XFMR1.3
I_3_P: IP.TP R6.1 U5.11 XFMR1.1 | length 20.5
  Top Layer w0.254: U5.11 4.151,19.753 4.023,19.881 4.023,19.902 R6.1 3.725,22.275 IP.TP 4.246,22.846 4.246,23.756 4.246,28.51 6.585,30.849 8.83,30.849 9.835,31.854 XFMR1.1
"ISO +12V": C2.1 L1.1 TP3.TP U2.5
ISOSPI_3_N: R1.3 XFMR1.14 | length 17.8
  Top Layer w0.254: XFMR1.14@22.337,29.314 XFMR1.14 22.068,29.378 23.078,29.378 24.092,30.392 27.988,30.392 28.722,31.126 28.722,32.312 29.824,33.414 31.877,33.414 33.399,31.892 33.399,31.682 33.25,31.533 R1.3
ISOSPI_3_P: R1.4 XFMR1.16 | length 18.6
  Top Layer w0.254: XFMR1.16 23.146,31.854 24.1,30.9 27.778,30.9 28.214,31.336 28.214,32.523 29.613,33.922 32.088,33.922 33.907,32.103 33.907,31.682 34.056,31.533 R1.4@36.455,31.533 ; R1.4@36.703,31.285 R1.4@36.455,31.533 ; R1.4 R1.4@36.455,31.533
"LDO +5V": +5V.TP C3.1 C4.1 C8.1 C9.1 C12.1 C13.1 C14.1 C15.1 C16.1 C17.1 C18.1 C19.1 LED2.1 R5.1 R9.1 U1.5 U3.5 U4.5 U5.6 U5.9 U6.3 U6.4 U6.15 U6.20 | length 76.1
  Top Layer w0.254: R5.1 3.45,13.075 4.55,13.075 4.227,13.398 4.227,13.448 4.151,13.524 U5.6 ; U5.9 5.984,18.784 v1(6,18.8) ; v1(9.9,14.9) 9.925,14.875 9.925,13.725 U6.15 ; U6.20 v1(13.8,13.7) ; C9.1@20.856,12.202 21.179,12.525 C9.1
  Top Layer w0.381: C3.1 31.34,9.075 U1.5 31.355,7.689 C4.1
  Top Layer w0.508: C13.1@4.55,13.075 C13.1 5.575,13.075 6,13.5 6,14.4 6.5,14.9 v1(9.9,14.9) 9.918,14.918 9.918,15.763 11.25,17.096 U6.4 ; v1(6,18.8) 6.4,19.2 6.4,21.1 7.331,22.031 9.544,22.031 R9.1 10.525,21.2 11.231,20.493 11.231,19.619 U6.4 ; U6.3 U6.4 ; v1(13.8,13.7) 16.083,11.417 17.977,11.417 18.275,11.12 18.275,10.148 18.61,9.813 20.613,9.813 20.856,10.056 U3.5 C9.1@20.856,12.202 ; U4.5 20.221,18.404 20.574,18.404 20.578,18.4 22.2,18.4 +5V.TP LED2.1 24.5,13.26 24.5,12.504 ; C9.1 21.221,12.504 24.5,12.504 ; C3.1 29.489,11.611 28.631,12.469 26.732,12.469 26.697,12.504 24.5,12.504
  Bottom Layer w0.254: C16.1@14.675,13.7 C16.1@14.875,13.5 ; C15.1@15.875,13.5 16.001,13.514 16.1,13.525 16.08,13.565 C15.1@16,13.725
  Bottom Layer w0.508: C12.1 v1(6,18.8) ; C17.1 C18.1 C19.1 v1(9.9,14.9) 9.9,14.5 10.7,13.7 v1(13.8,13.7) C16.1@14.675,13.7 ; C16.1@14.875,13.5 C15.1@15.875,13.5 ; C15.1@16.1,13.525 C14.1
MISO: MISO.TP R9.2 U5.3 U6.9 | length 17.4
  Top Layer w0.254: MISO.TP 2.621,8.621 2.621,13.828 2.649,13.857 U5.3 2.649,16.269 3.174,16.794 6.894,16.794 8,17.9 U6.9 8.098,19.698 8.098,20.473 R9.2
MOSI: MOSI.TP R5.2 U5.2 U6.8 | length 15.3
  Top Layer w0.254: MOSI.TP 1.825,10.125 R5.2 2.149,13.324 U5.2 2.149,16.343 3.006,17.2 6.725,17.2 7.35,17.825 v1(7.35,18.25) ; v1(8.65,18.25) U6.8
  Bottom Layer w0.254: v1(7.35,18.25) v1(8.65,18.25)
NetC5_1: C5.1 L1.2 U1.1 U1.3 | length 9.4
  Top Layer w0.381: U1.3 32.775,10.96 32.606,10.791 32.606,9.322 32.868,9.06 U1.1 C5.1@35.279,9.06 ; C5.1 35.264,9.075 C5.1@35.279,9.06 ; L1.2 37.633,7.973 37.206,8.4 35.939,8.4 C5.1@35.279,9.06
NetC10_1: C10.1 IN+.TP R2.2 U4.3 | length 6.4
  Top Layer w0.254: U4.3 17.475,16.5 v2(18.5,16.5) 19.7,15.3 IN+.TP
  Bottom Layer w0.254: R2.2 18.6,14.875 C10.1 ; R2.2@18.5,15 v2(18.5,16.5)
NetC11_1: C11.1 XFMR1.2 | length 1.6
  Top Layer w0.254: C11.1 11.716,30.584 XFMR1.2
NetC20_1: C20.1 U6.17 | length 1.6
  Top Layer w0.254: C20.1 10.9,12.25 11.25,12.6 U6.17
NetC20_2: C20.2 U6.18 | length 1.7
  Top Layer w0.254: U6.18 11.9,12.6 12.25,12.25 C20.2 ; U6.18@11.925,13.75 U6.18@11.935,13.74
NetC21_1: C21.1 R10.2 U6.1 | length 4.1
  Top Layer w0.254: U6.1 14.775,19.6 15.302,19.073 15.352,19.073 15.625,18.8 15.625,18.75 15.725,18.85 R10.2
NetC21_2: C21.2 R11.2 U6.2 | length 3.9
  Top Layer w0.254: U6.2 12.648,19.502 12.648,18.807 12.859,18.596 14.221,18.596 C21.2 14.325,18.596 14.325,17.5 R11.2
NetC23_1: C23.1 U6.13 | length 1.6
  Top Layer w0.254: U6.13 8.65,12.125 C23.1
NetL2_2: L2.2 U2.2 | length 3
  Top Layer w0.254: U2.2@28.022,20.236 U2.2
  Top Layer w0.508: L2.2 U2.2@28.022,20.236
NetLED1_2: LED1.2 R3.1 | length 1.3
  Top Layer w0.254: LED1.2@27.034,27.5 27.037,27.503 LED1.2
  Top Layer w0.508: R3.1 LED1.2@27.034,27.5
NetLED2_2: LED2.2 R4.1 | length 1.4
  Top Layer w0.254: LED2.2 R4.1@27.315,13.31
NetR2_1: R2.1 U3.8 | length 2.8
  Top Layer w0.254: U3.8 v2(18.906,12.494)
  Bottom Layer w0.254: R2.1@18.5,13.625 18.5,12.9 v2(18.906,12.494)
NetR7_1: R7.1 U5.16 | length 1.7
  Top Layer w0.254: R7.1 1.649,19.576 U5.16
NetR7_2: R7.2 R8.1 U5.15 | length 2.9
  Top Layer w0.254: U5.15 2.149,19.774 R7.2 R8.1
NetR10_1: R10.1 U4.1 U4.4 | length 5.6
  Top Layer w0.254: R10.1@17.225,19.95 R10.1 17.425,19.85 U4.1 17.432,18.443 18.157,18.443 18.8,17.8 18.8,17.2 19.443,16.557 20.168,16.557 U4.4
SCK: SCK.TP U5.4 U6.7 | length 16.2
  Top Layer w0.254: U5.4 3.15,15.95 v1(3.4,16.2) 7.425,16.2 9.3,18.075 U6.7 ; SCK.TP v1(3.4,11)
  Bottom Layer w0.254: v1(3.4,11) v1(3.4,16.2)
SENSE_2_P: pad.1 R1.5 U3.2 | length 8.4
  Top Layer w0.457: R1.5 15.836,7.1 18.7,7.1 19.556,6.244 U3.2
  other v1: 1.016,1.44 3.556,1.44 6.096,1.44 8.636,1.44 11.176,1.44 13.716,1.44 16.256,1.44 16.256,3.98 1.016,5.25 3.556,5.25 6.096,5.25 8.636,5.25 11.176,5.25 16.256,6.52
SENSE_N: C2.2 C3.2 C4.2 C5.2 C7.2 C8.2 C9.2 C10.2 C11.2 C12.2 C13.2 C14.2 C15.2 C16.2 C17.2 C18.2 C19.2 C22.2 C23.2 pad.2 R1.6 R4.2 R8.2 TP2.TP U1.2 U2.4 U3.1 U3.3 U3.4 U4.2 U5.1 U5.7 U5.8 U5.12 U5.13 U5.14 U6.11 U6.14 U6.19 XFMR1.6 XFMR1.7 XFMR1.8 | length 40.8
  Top Layer w0.254: v1(1,22.6) 1,21.525 R8.2 ; v1(1.5,15.6) 1.5,15.506 1.649,15.358 U5.1 ; TP2.TP v1(3.4,29.5) ; U5.14 U5.13 U5.12 ; C13.2 5.925,11.725 v1(6.3,12.1) C23.2 7.325,13.675 U6.11 ; U5.7 U5.8 5.151,14.926 5.159,14.934 5.534,14.934 v1(5.6,15) ; U6.14 9.318,13.682 9.318,12.882 v1(9.8,12.4) ; v1(9.4,30.6) C11.2 ; U6.19 12.55,14.85 v1(12.6,14.9) ; v1(16.3,17.5) U4.2 ; v1(18.9,4.1) v1@18.903,4.103 ; U3.1@18.903,5.197 U3.1 ; U3.4 U3.4@20.878,5.178 ; v1@20.878,4.122 v1(20.9,4.1) ; C9.2 22.131,13.875 22.206,13.8 v1(22.3,13.8) ; v1(21.5,16) C8.2 ; 27.5,11 v1(28.7,11)
  Top Layer w0.305: C4.2 v1(33.909,7.663) 35.117,7.663 C5.2
  Top Layer w0.457: v1@18.903,4.103 U3.1@18.903,5.197 ; U3.3 20.206,6.206 21.1,7.1 23.77,7.1 R1.6 ; v1@20.878,4.122 U3.4@20.878,5.178
  Top Layer w0.508: XFMR1.8 XFMR1.7 XFMR1.6 ; C7.2 C9.2
  Bottom Layer w0.508: C17.2 C19.2 ; C16.2 C15.2 C14.2
  other v1: 22.606,1.44 25.146,1.44 27.686,1.44 30.226,1.44 32.766,1.44 35.306,1.44 37.846,1.44 22.606,3.98 30.226,5.25 32.766,5.25 35.306,5.25 22.606,6.52 1.006,8.1 6.006,8.1 11.006,8.1 35.206,10.3 34.29,11.854 33.506,13.1 26.289,15.283 29.972,15.283 1.006,18.1 8.506,23.1 11.8,24.2 14.8,24.2 1.006,28.1
VREF: C7.1 C22.1 R11.1 U3.6 U3.7 U6.16 VREF.TP | length 15.6
  Top Layer w0.254: U6.16 10.65,13.75 10.65,14.841 11.734,15.925 R11.1 16.1,15.925 16.488,15.925 19.515,12.898 19.515,12.848 19.838,12.525 C7.1 ; 19.9,10.4 19.9,10.6
  Top Layer w0.762: 19.9,10.6 19.9,11 19.9,11.6
  Top Layer w1.016: C7.1@19.888,12.3 19.888,11.612 19.9,11.6
  Bottom Layer w0.254: v1(10.7,14.9) 11.2,14.9 11.325,15.025 C22.1
pads on no net: R1.0 U1.4 U2.8 U6.5 U6.10 U6.12 XFMR1.4 XFMR1.5 XFMR1.12 XFMR1.13 XFMR1.15

## Polygon pours and split planes (outlines as drawn)
GND on Top Layer "GND_L01_P067" (solid, pour order 67): 21.8,28.2 21.8,20.4 23.615,18.585 39.506,18.585 39.506,28.2
SENSE_N on Top Layer "SENSE_N_L01_P068" (solid, remove dead copper, pour order 68): 10.7,26 10.7,34.35 0.006,34.35 0.006,-0.15 39.506,-0.15 39.506,17.569 23.031,17.569 14.6,26
SENSE_2_P on Top Layer "SENSE_2_P_L01_P066" (solid, pour order 66): 18.161,11.2 18.161,-0.1 0.1,-0.1 0.1,6.8 11.4,6.8 11.4,11.2
SENSE_N on Top Layer "SENSE_N_L01_P065" (solid, pour order 65): 21.606,11.2 21.606,-0.1 39.506,-0.1 39.506,6.8 28.206,6.8 28.206,11.2
"ISO +12V" on Top Layer "ISO_+12V_L01_P064" (solid, pour order 64): 39.497,16.1 39.506,16.091 39.506,8.1 36.006,8.1 36.006,16.1
GND on Bottom Layer "GND_L02_P080" (solid, pour order 80): 21.794,28.2 21.794,20.406 23.6,18.6 39.5,18.585 39.5,28.2
SENSE_N on Bottom Layer "SENSE_N_L02_P070" (solid, pour order 70): 21.606,11.2 21.606,-0.1 39.506,-0.1 39.506,6.8 28.206,6.8 28.206,11.2
SENSE_N on Bottom Layer "SENSE_N_L02_P072" (solid, pour order 72): 0.006,34.35 0.006,-0.15 39.506,-0.15 39.506,17.569 23.028,17.572 20.7,19.9 20.7,34.35
SENSE_2_P on Bottom Layer "SENSE_2_P_L02_P069" (solid, pour order 69): 18,11.2 18,-0.1 0.1,-0.1 0.1,6.8 11.4,6.8 11.4,11.2

## Keep-outs
Keep-Out Layer:
  lines w0.254: 0,0 0,34.333 39.506,34.333 39.506,0 0,0

## Other copper
Top Layer:
  pour cut-out: 11.311,11.164 11.311,11.321 18.161,11.321 18.161,11.164
  pour cut-out: 11.545,6.822 11.405,6.822 11.405,11.197 11.545,11.197
  pour cut-out: 0.421,6.796 11.436,6.796 11.436,6.946 0.406,6.946
  pour cut-out: 21.606,0.135 39.221,0.135 39.231,0.125 39.231,0.1 21.606,0.1
  pour cut-out: 39.221,6.8 39.221,0.15
  pour cut-out: 39.221,6.8 28.206,6.8 28.206,6.95 39.236,6.95
  pour cut-out: 28.206,6.825 28.346,6.825 28.346,11.2 28.206,11.2
  pour cut-out: 28.331,11.168 28.331,11.325 21.481,11.325 21.481,11.168
  pour cut-out: 18.161,11.325 21.606,11.325 21.606,0.275 21.606,0.135 21.466,0.135 18.161,0.135
Bottom Layer:
  pour cut-out: 0.53,6.8 11.545,6.8 11.545,6.95 0.515,6.95
  pour cut-out: 11.545,6.8 11.405,6.8 11.405,11.325 11.545,11.325
  pour cut-out: 11.42,11.168 11.42,11.325 18.161,11.325 18.161,11.168
  pour cut-out: 18.161,-0.011 18.009,-0.011 18.009,11.321 18.161,11.321
  pour cut-out: 21.59,-0.011 21.742,-0.011 21.742,11.321 21.59,11.321
  pour cut-out: 28.331,11.168 28.331,11.325 21.59,11.325 21.59,11.168
  pour cut-out: 28.206,6.8 28.346,6.8 28.346,11.325 28.206,11.325
  pour cut-out: 39.221,6.8 28.206,6.8 28.206,6.95 39.236,6.95

## Silkscreen, mask and mechanical layers (free items; w line width, h text height)
Top Overlay:
  lines w0.254: 6.858,3.599 11.43,3.599 ; 10.922,3.091 11.43,3.599 ; 10.922,4.107 11.43,3.599 ; 20.9,34.3 20.9,20.5 23.4,18 39.5,18 39.506,17.994
  text "IN" at 28.067,32.936 h0.8
  text "IP" at 37.846,32.936 h0.8
  text "PWR" at 25.3,29.1 h0.8
  text "12V" at 32.4,28.4 h0.8 r270
  text "GND" at 34,28.4 h0.8 r270
  text "ISO / GND" at 0.9,26.2 h0.8
  text "12V" at 37.846,14.648 h0.8 r270
  text "+" at 13.716,6.647 h0.8
  text "-" at 26.416,6.647 h0.8
  text "+I" at 8.382,4.107 h0.8
  text "F" at 2.845,1.821 h6.35
  text "MSXIV BMS CURRENT SENSE  / REV 3.0" at 0.006,0.3 h0.8
  text "CAUTION HV" at 0.881,0.3 h0.8